# EAGLE board CIRCUIT (EAGLE 7.6.0)

Size 73.58 x 63.39 mm. Coordinates in mm from the lower left corner, seen from the top.
Outline: 0,0 56.82,0 56.82,53.33 0,53.33 0,0
Copper layers (1*16): Top 0.035mm / dielectric 1.5mm / Bottom 0.035mm
Design rules "default": minimum track width 10mil, minimum drill 24mil, track to track 8mil, track to pad 8mil, pad to pad 8mil, via to via 8mil, smd to smd 8mil, copper to edge 40mil, drill to drill 8mil, minimum pad ring 10mil, minimum via ring 8mil, stop-mask expansion 4mil, vias tented up to drill 0mil, thermal gap 10mil

## Footprints (pad centres in the part's own frame; a part is rotated, then mirrored left to right if it is on the bottom)
PIEZO-22MM = drill 1 pad 2.54: P$1 -5,0; P$2 5,0
0207/10 = drill 0.813 octagon: 1 -5.08,0; 2 5.08,0
TL1105 = drill 1 pad 1.676: 1 -2.25,3.25; 2 2.25,3.25; 3 -2.25,-3.25; 4 2.25,-3.25
ARDUINO_UNO = drill 1.016 pad 1.88: 0 63.5,50.8; 1 60.96,50.8; 2 58.42,50.8; 3 55.88,50.8; 3.3V 35.56,2.54; 4 53.34,50.8; 5 50.8,50.8; 5V 38.1,2.54; 6 48.26,50.8; 7 45.72,50.8; 8 41.656,50.8; 9 39.116,50.8; 10 36.576,50.8; 11 34.036,50.8; 12 31.496,50.8; 13 28.956,50.8; A0 50.8,2.54; A1 53.34,2.54; A2 55.88,2.54; A3 58.42,2.54; A4 60.96,2.54; A5 63.5,2.54; AREF 23.876,50.8; GND 26.416,50.8; GND. 43.18,2.54; GND.. 40.64,2.54; I/OREF 30.48,2.54; N/C 27.94,2.54; RESET 33.02,2.54; SCL 18.796,50.8; SDA 21.336,50.8; VIN 45.72,2.54 | hole 3.2: 66.04,7.62; 66.04,35.56; 15.24,50.8; 13.97,2.54

## Placement (x,y rotation side)
PIEZO1  [PIEZO-22MM]  5,124.38 0 top  (outside the outline)
R1  1k‎Ω  [0207/10]  5,137.08 0 top  (outside the outline)
R2  1k‎Ω  [0207/10]  5,149.78 0 top  (outside the outline)
R3  1k‎Ω  [0207/10]  5,162.48 0 top  (outside the outline)
R4  1k‎Ω  [0207/10]  5,175.18 0 top  (outside the outline)
R5  1k‎Ω  [0207/10]  5,187.88 0 top  (outside the outline)
R6  1k‎Ω  [0207/10]  5,200.58 0 top  (outside the outline)
R7  1k‎Ω  [0207/10]  5,213.28 0 top  (outside the outline)
R8  1k‎Ω  [0207/10]  5,225.98 0 top  (outside the outline)
S1  [TL1105]  5,22.78 0 top
S2  [TL1105]  5,35.48 0 top
S3  [TL1105]  5,48.18 0 top
S4  [TL1105]  5,60.88 0 top
S5  [TL1105]  5,73.58 0 top  (outside the outline)
S6  [TL1105]  5,86.28 0 top  (outside the outline)
S7  [TL1105]  5,98.98 0 top  (outside the outline)
S8  [TL1105]  5,111.68 0 top  (outside the outline)
U1  [ARDUINO_UNO]  5,10.08 0 top

## Library data of the parts
PIEZO1 R1-R8 S1-S8 U1 = AUTODESK_CIRCUITS_BREADBOARD

## Nets
N$1: R1.2 S1.4
N$2: S1.2 U1.2
N$3: S1.1
N$4: R2.2 S2.4
N$5: S2.2 U1.3
N$6: S2.1
N$7: R3.2 S3.4
N$8: S3.2 U1.4
N$9: S3.1
N$10: R5.2 S5.4
N$11: S5.2 U1.6
N$12: S5.1
N$13: R4.2 S4.4
N$14: S4.2 U1.5
N$15: S4.1
N$16: S6.1
N$17: R7.2 S7.4
N$18: S7.2 U1.8
N$19: S7.1
N$20: S8.2 U1.9
N$21: S8.1
N$22: PIEZO1.P$1 U1.13
N$23: PIEZO1.P$2 R1.1 R2.1 R3.1 R4.1 R5.1 R6.1 R7.1 R8.1 U1.GND..
N$24: R6.2 S6.4
N$25: R8.2 S8.4
N$26: S1.3 S2.3 S3.3 S4.3 S5.3 S6.3 S7.3 S8.3 U1.5V
N$27: S6.2 U1.7

## Tracks (layer width: path | path; a pad name or v marks a point on that pad's centre or on a via)
N$1  (1 unrouted)
N$2  (1 unrouted)
N$4  (1 unrouted)
N$5  (1 unrouted)
N$7  (1 unrouted)
N$8  (1 unrouted)
N$10  (1 unrouted)
N$11  (1 unrouted)
N$13  (1 unrouted)
N$14  (1 unrouted)
N$17  (1 unrouted)
N$18  (1 unrouted)
N$20  (1 unrouted)
N$22  (1 unrouted)
N$23  (9 unrouted)
N$24  (1 unrouted)
N$25  (1 unrouted)
N$26  (8 unrouted)
N$27  (1 unrouted)